# Altium PCB 100mH common mode choke.pcbdoc
Units mm, origin at the board's own origin, x right, y up, seen from the top; angles counter-clockwise.
Board outline 24.76 x 29.7 mm, 2 copper layers (Top Layer, Bottom Layer); 1 components, 0 nets, 4 pads, 0 vias.
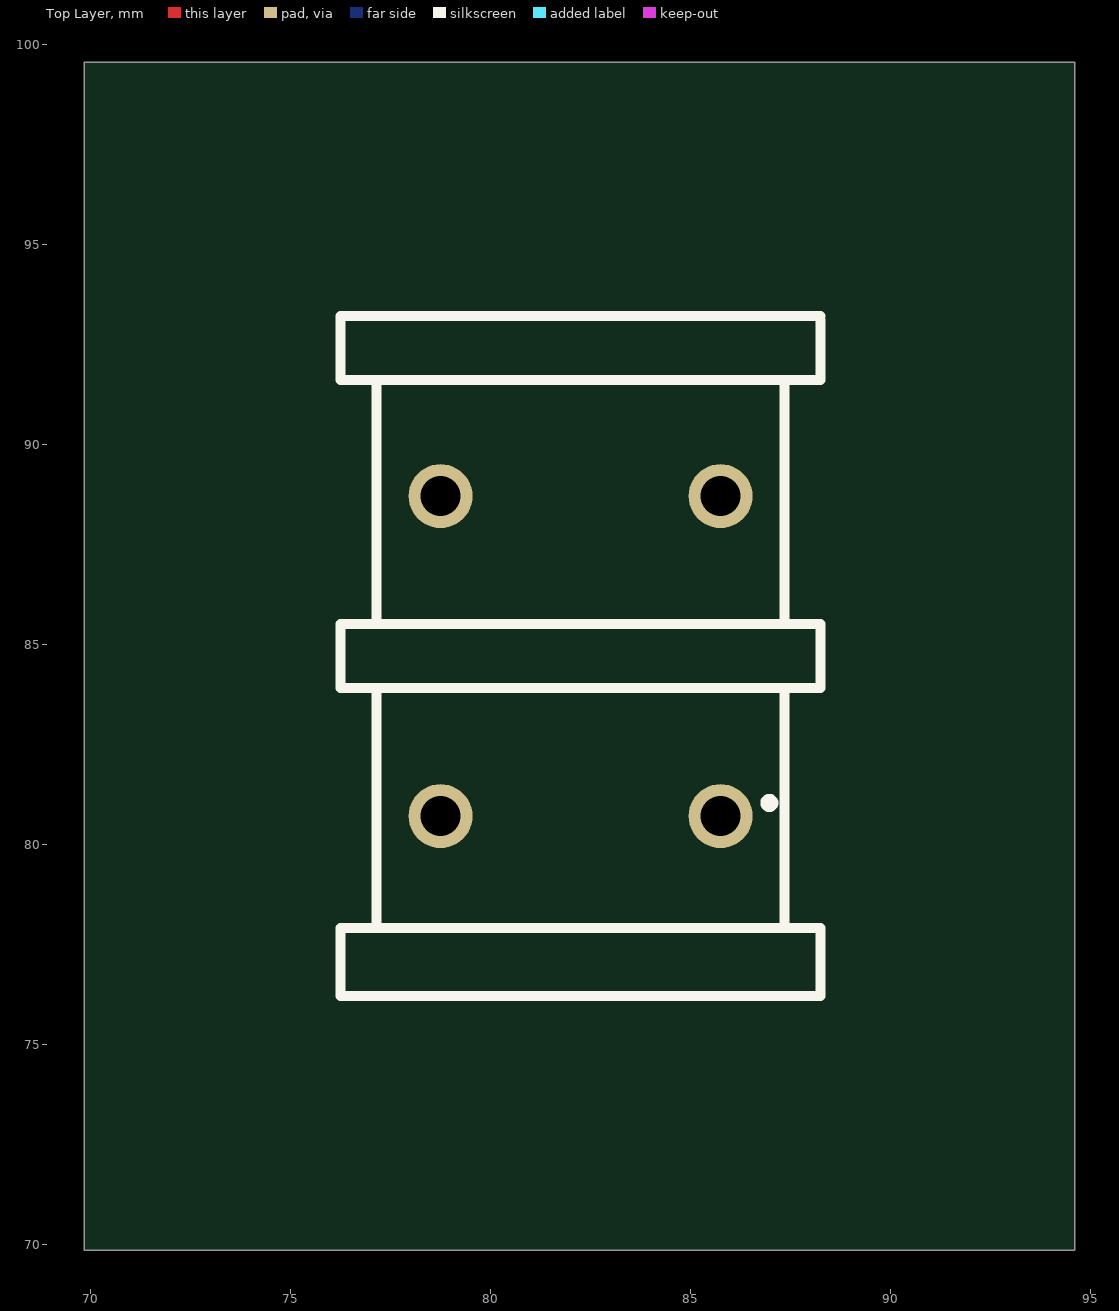
[diagram p0: Top Layer view]
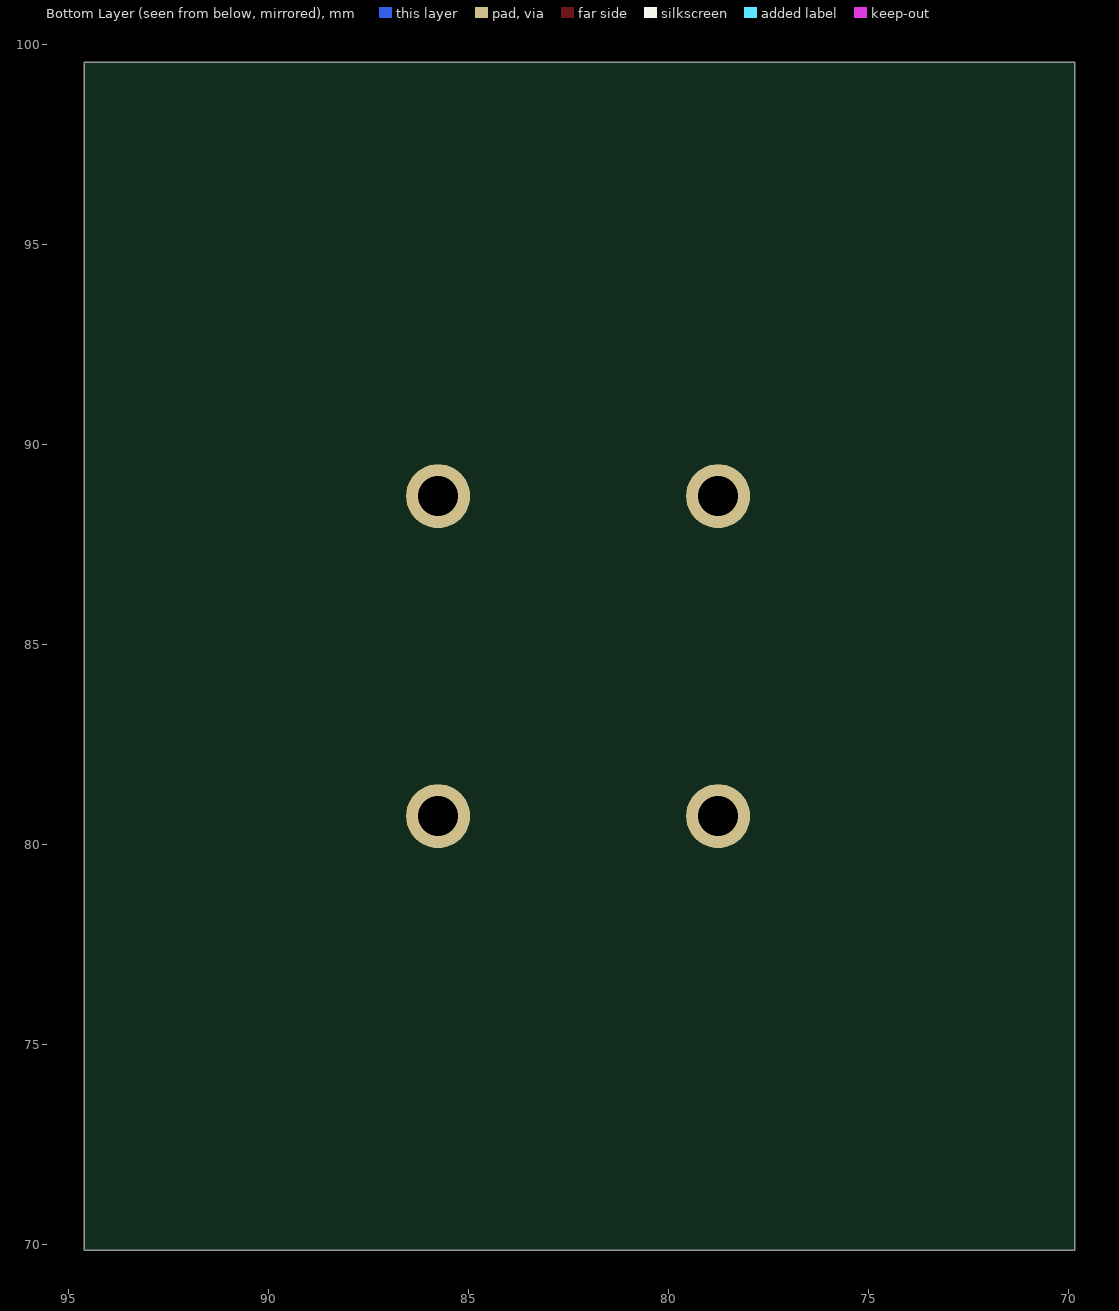
[diagram p1: Bottom Layer view, seen from below]

## Layer stack, top to bottom
Top Layer: signal copper (thickness not stored)
Dielectric: dielectric 0.32, FR-4, Dk 4.8
Bottom Layer: signal copper (thickness not stored)

## Board outline
94.61,69.85 69.85,69.85 69.85,99.55 94.61,99.55

## Components (designator, comment, footprint, x,y, rotation, side; value= is the part's Value field where it differs from the comment)
? "FILTER-TH_4P-L17.0-W12.0-P7.00-D0.6-S8.00" FILTER-TH_4P-L17.0-W12.0-P7.00-D0.6-S8.00 82.26,84.7 r0 top

## Footprints (in the part's own frame and the unit in brackets; to place one, negate y for a bottom-side part, rotate by r counter-clockwise, add the part's x,y. Pads: shape width x height; smd on the part's side, far side on the other; paste and mask are expansions set on the pad)
FILTER-TH_4P-L17.0-W12.0-P7.00-D0.6-S8.00 [mm]
  round 1.6 hole 1: 1(3.5,-4) 2(-3.5,-4) 3(-3.5,4) 4(3.5,4)
  silkscreen extent -6,-8.5 6,8.5

## Nets (pads, with @x,y where several pads share a name; then routed paths per layer and width w, separated by ;. In a path a pad name is that pad's centre, name@x,y a point inside that pad or via, vN(x,y) a via of type N, cw(c..) or ccw(c..) an arc to the next point about the centre after c; other vN are vias at no path point)
pads on no net: ?.1 ?.2 ?.3 ?.4